# Altium PCB Simple Sensor PCB.PcbDoc
Units mm, origin at the board's own origin, x right, y up, seen from the top; angles counter-clockwise.
Board outline 38.5 x 38.5 mm, 4 copper layers (Top Layer, GND, 3.3V, Bottom Layer), stack 1.334 mm thick; 19 components, 10 nets, 64 pads, 22 vias.
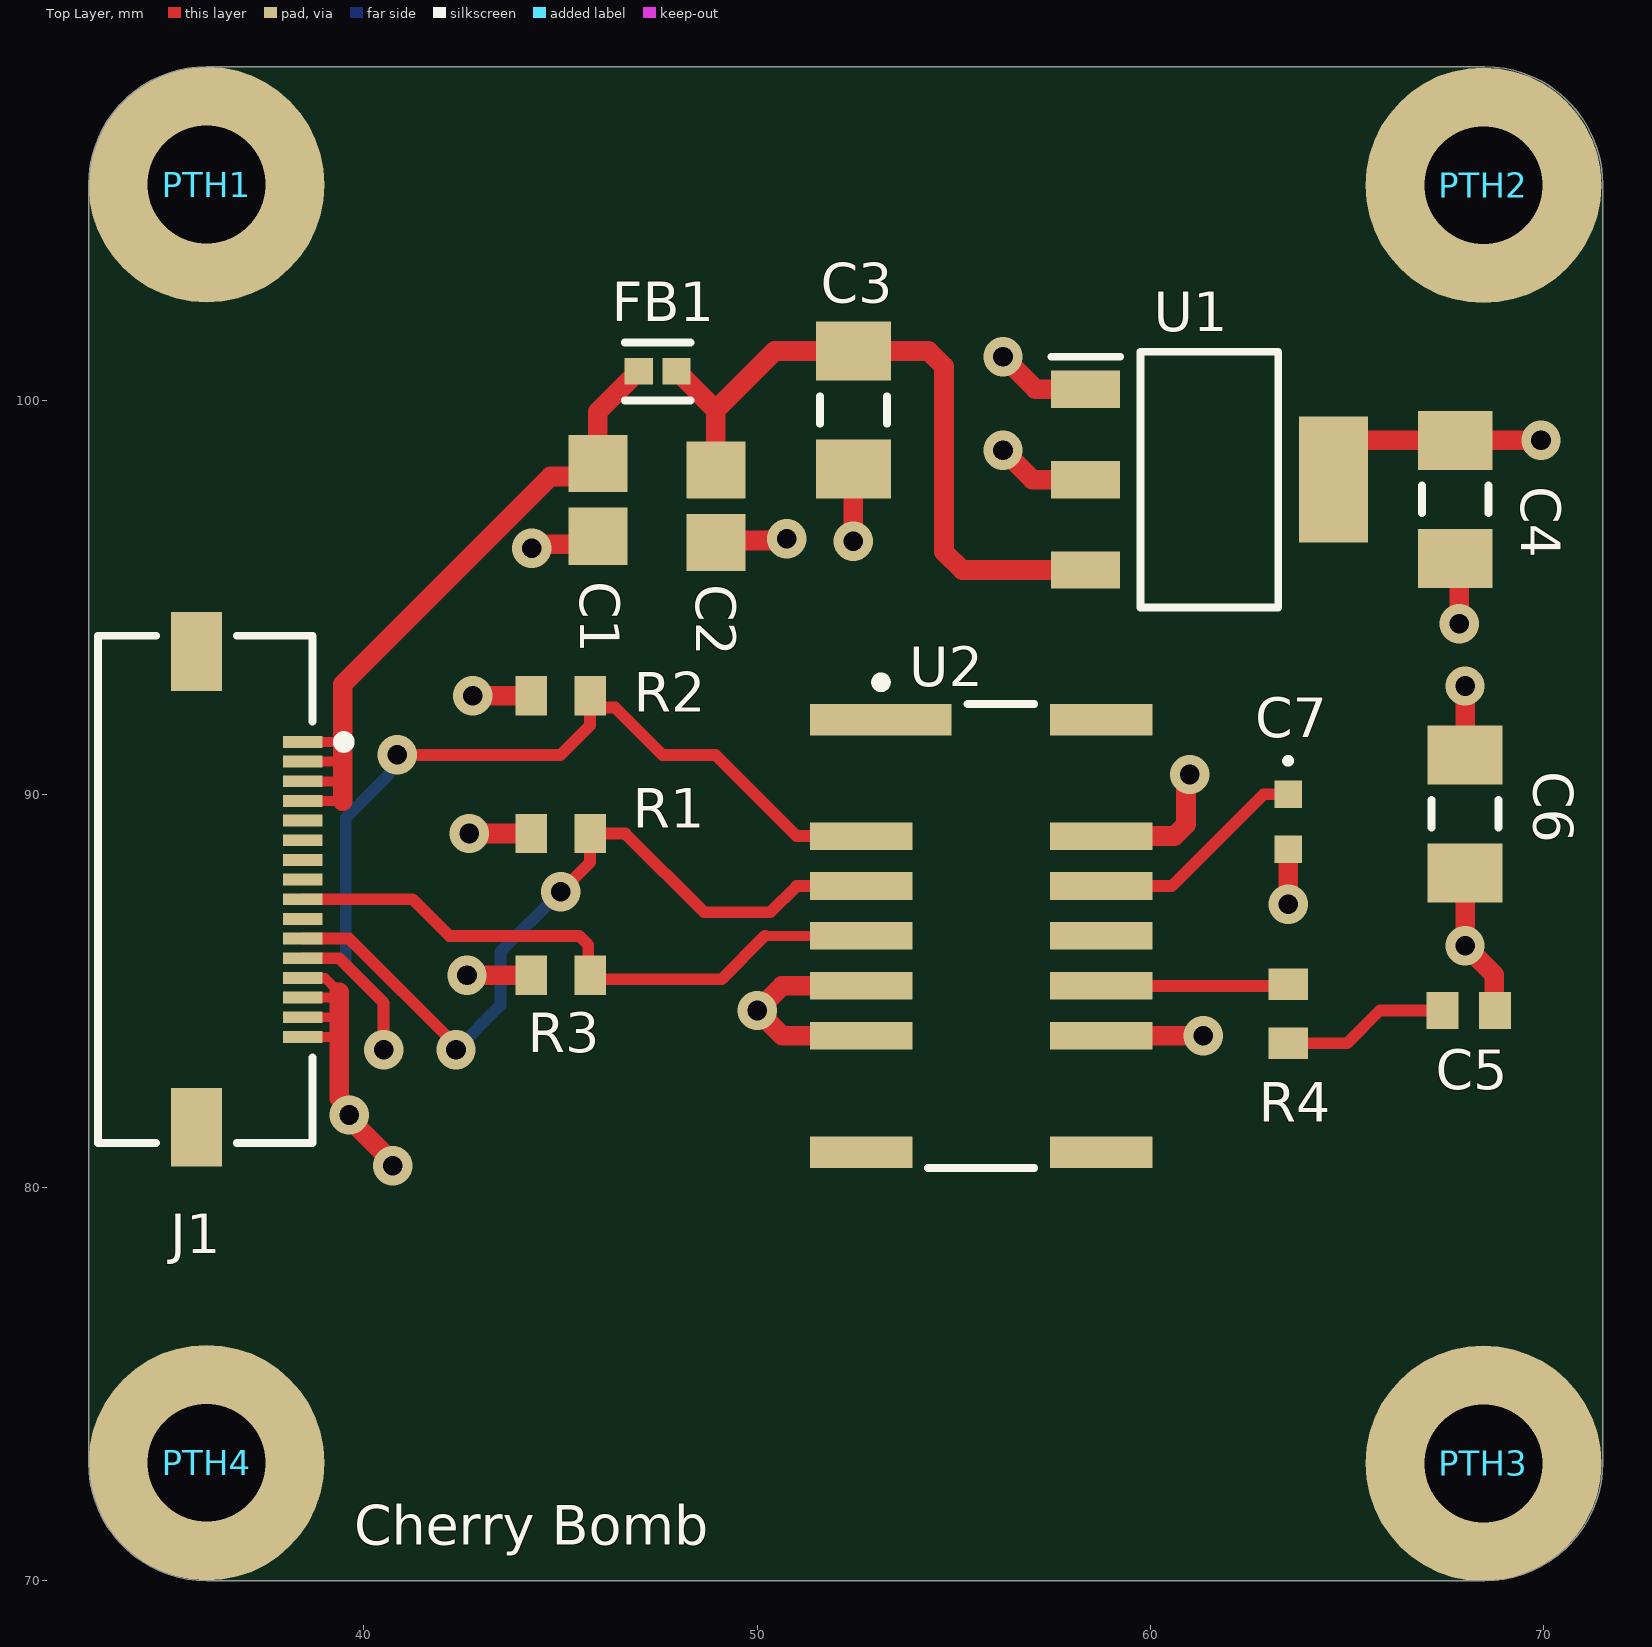
[diagram p0: Top Layer view]
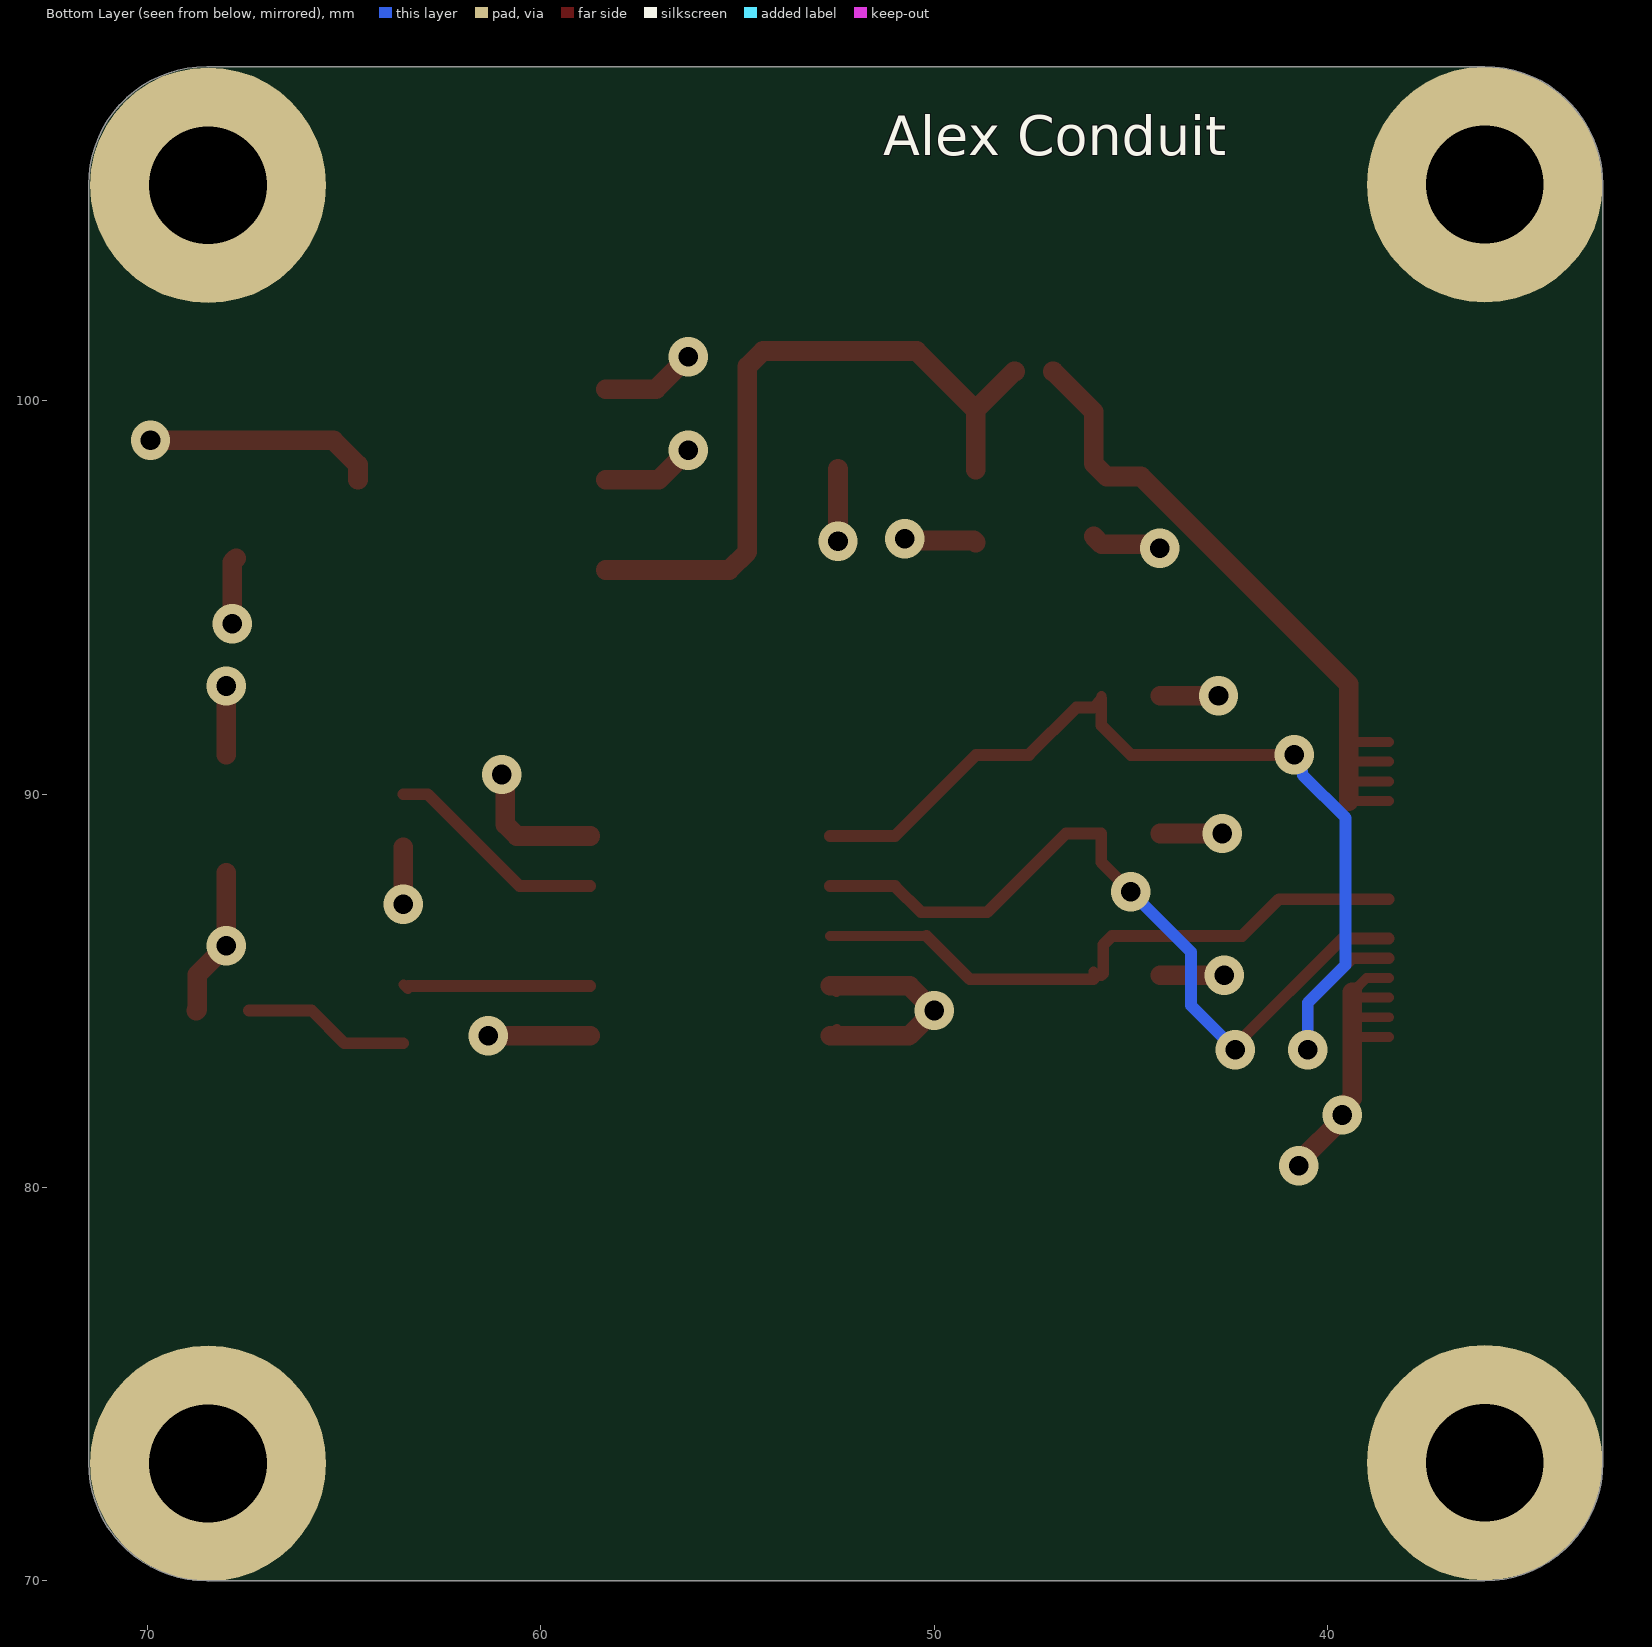
[diagram p1: Bottom Layer view, seen from below]
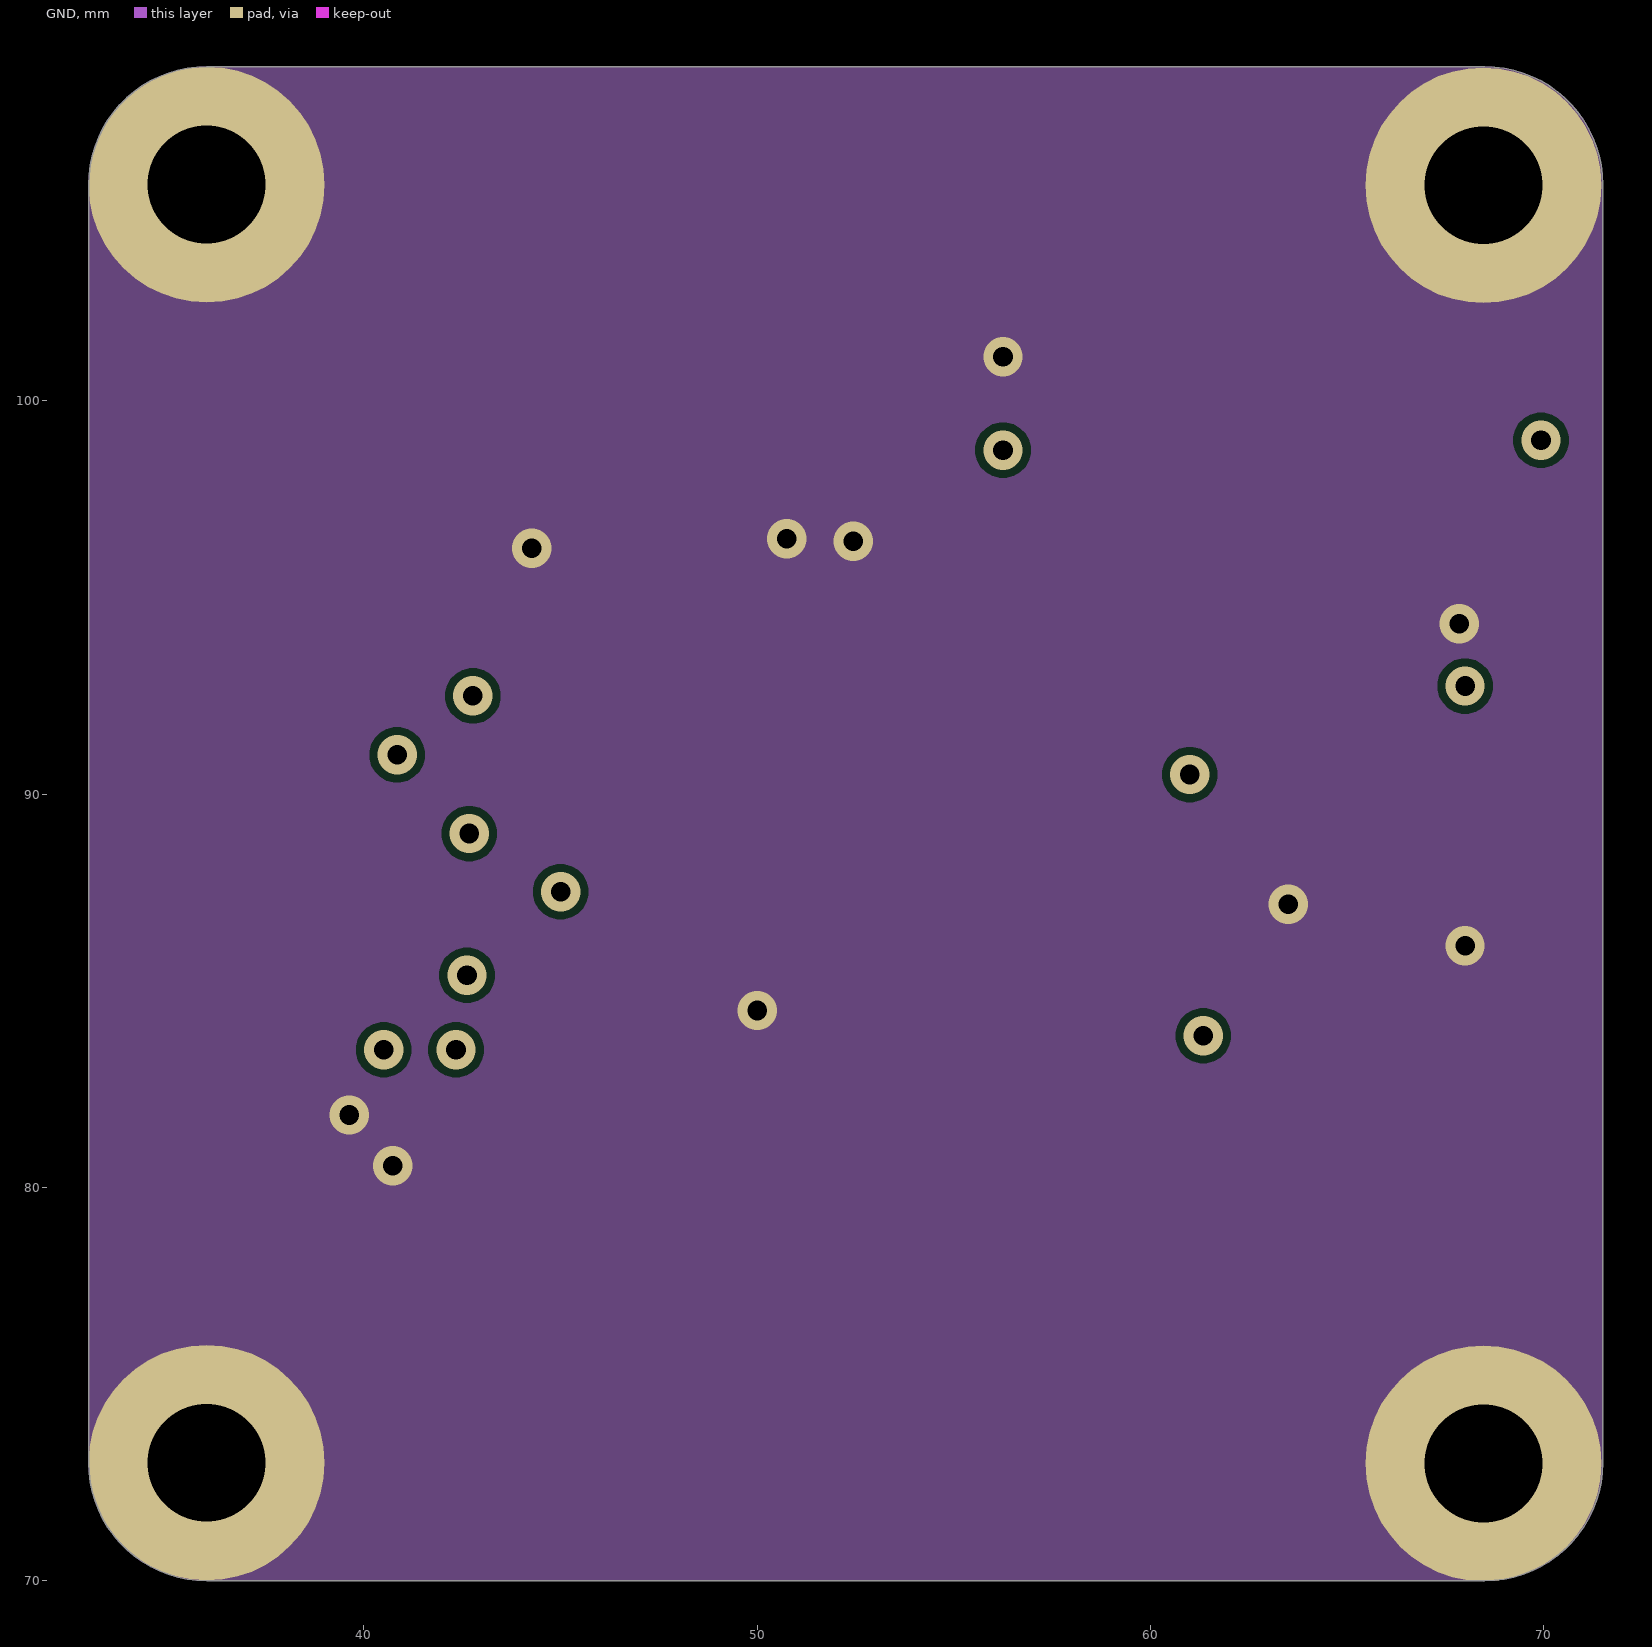
[diagram p2: GND]
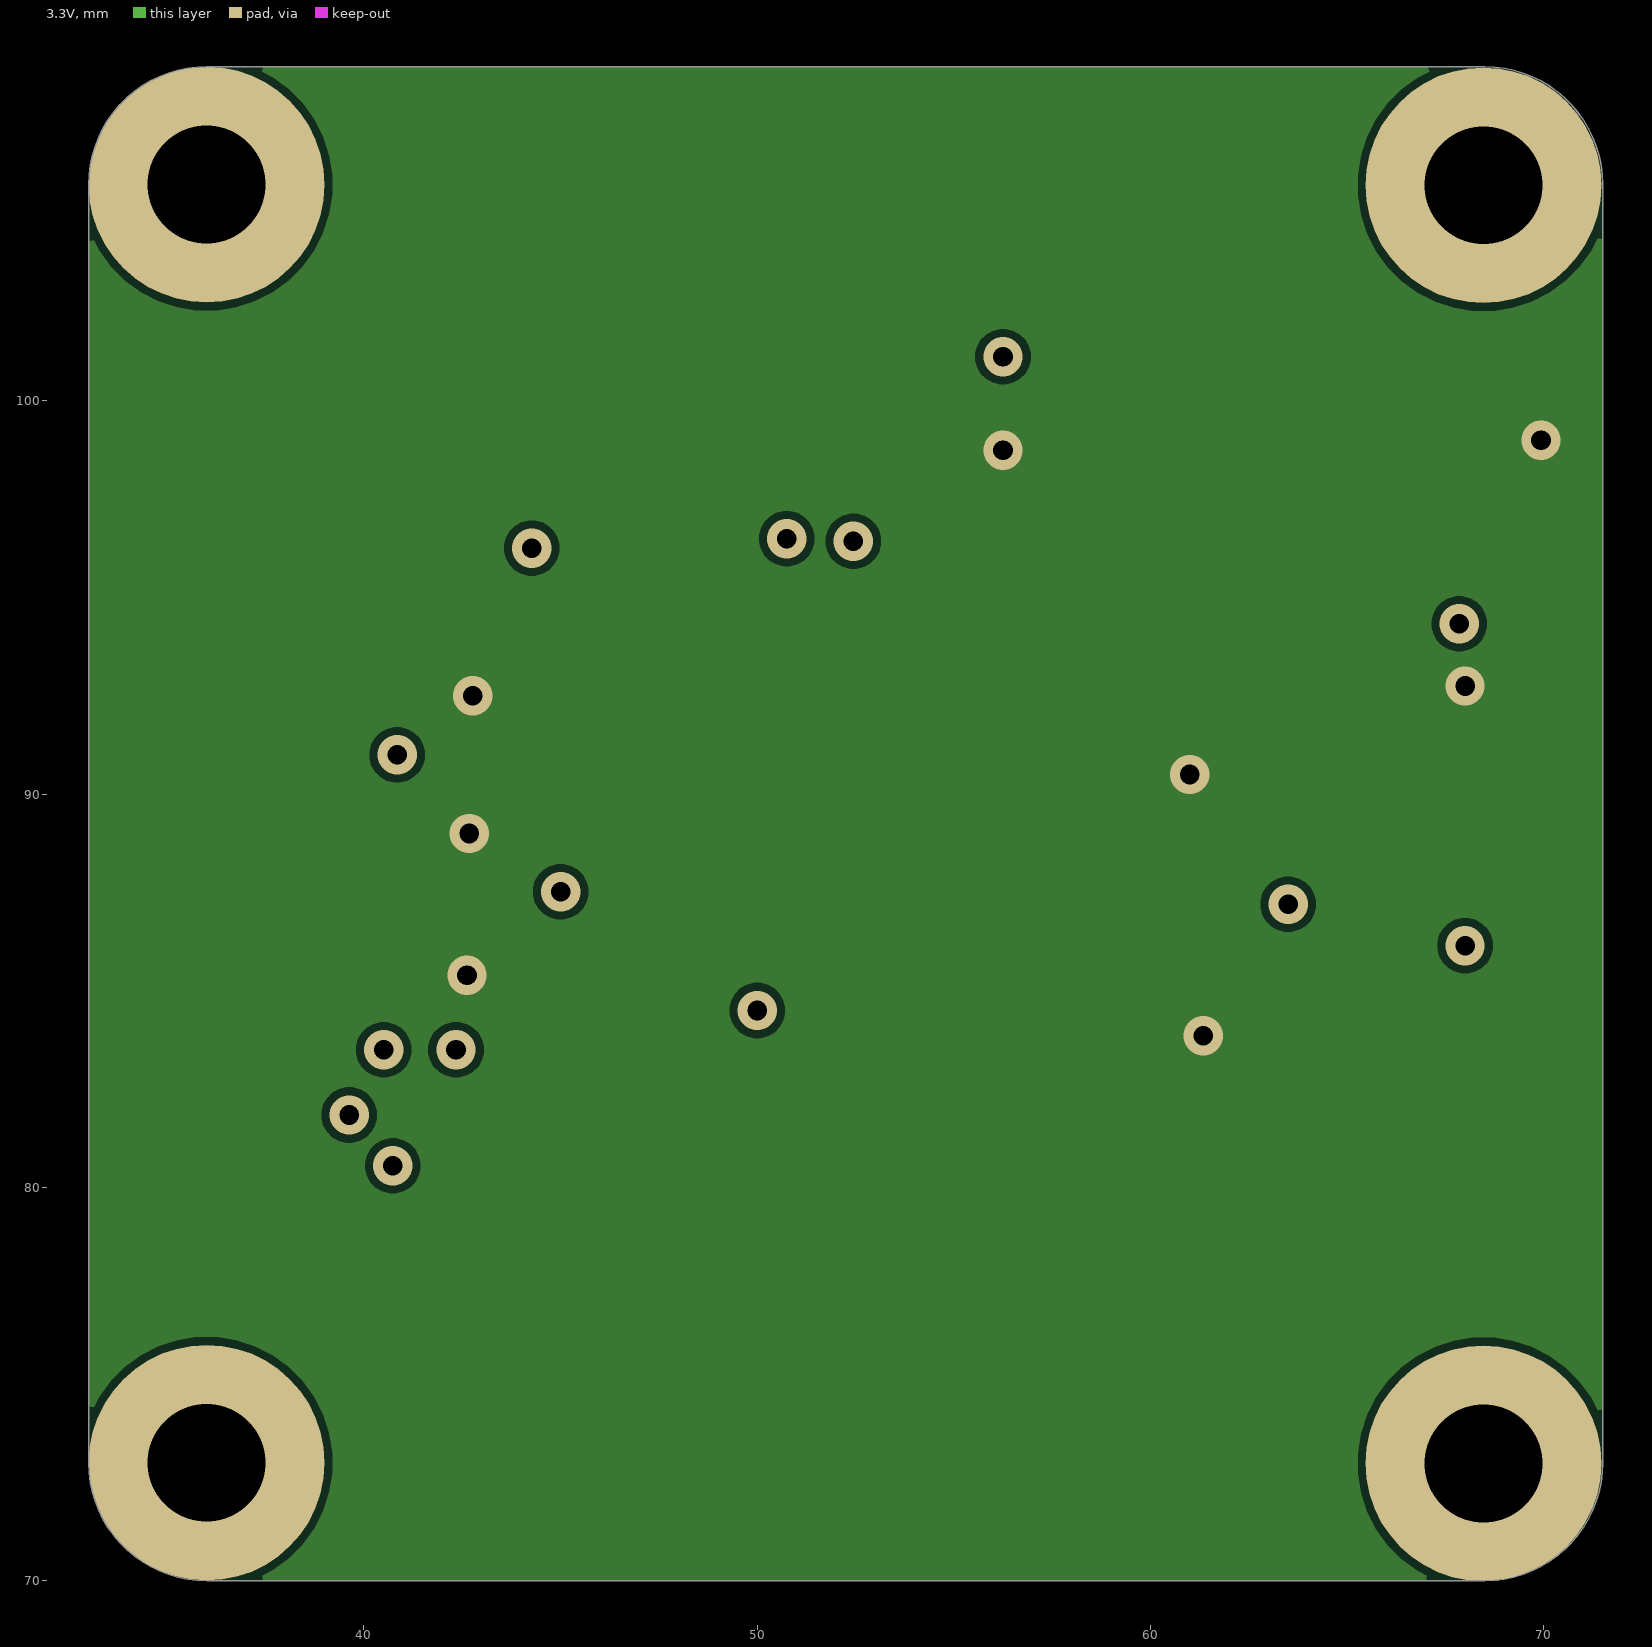
[diagram p3: 3.3V]
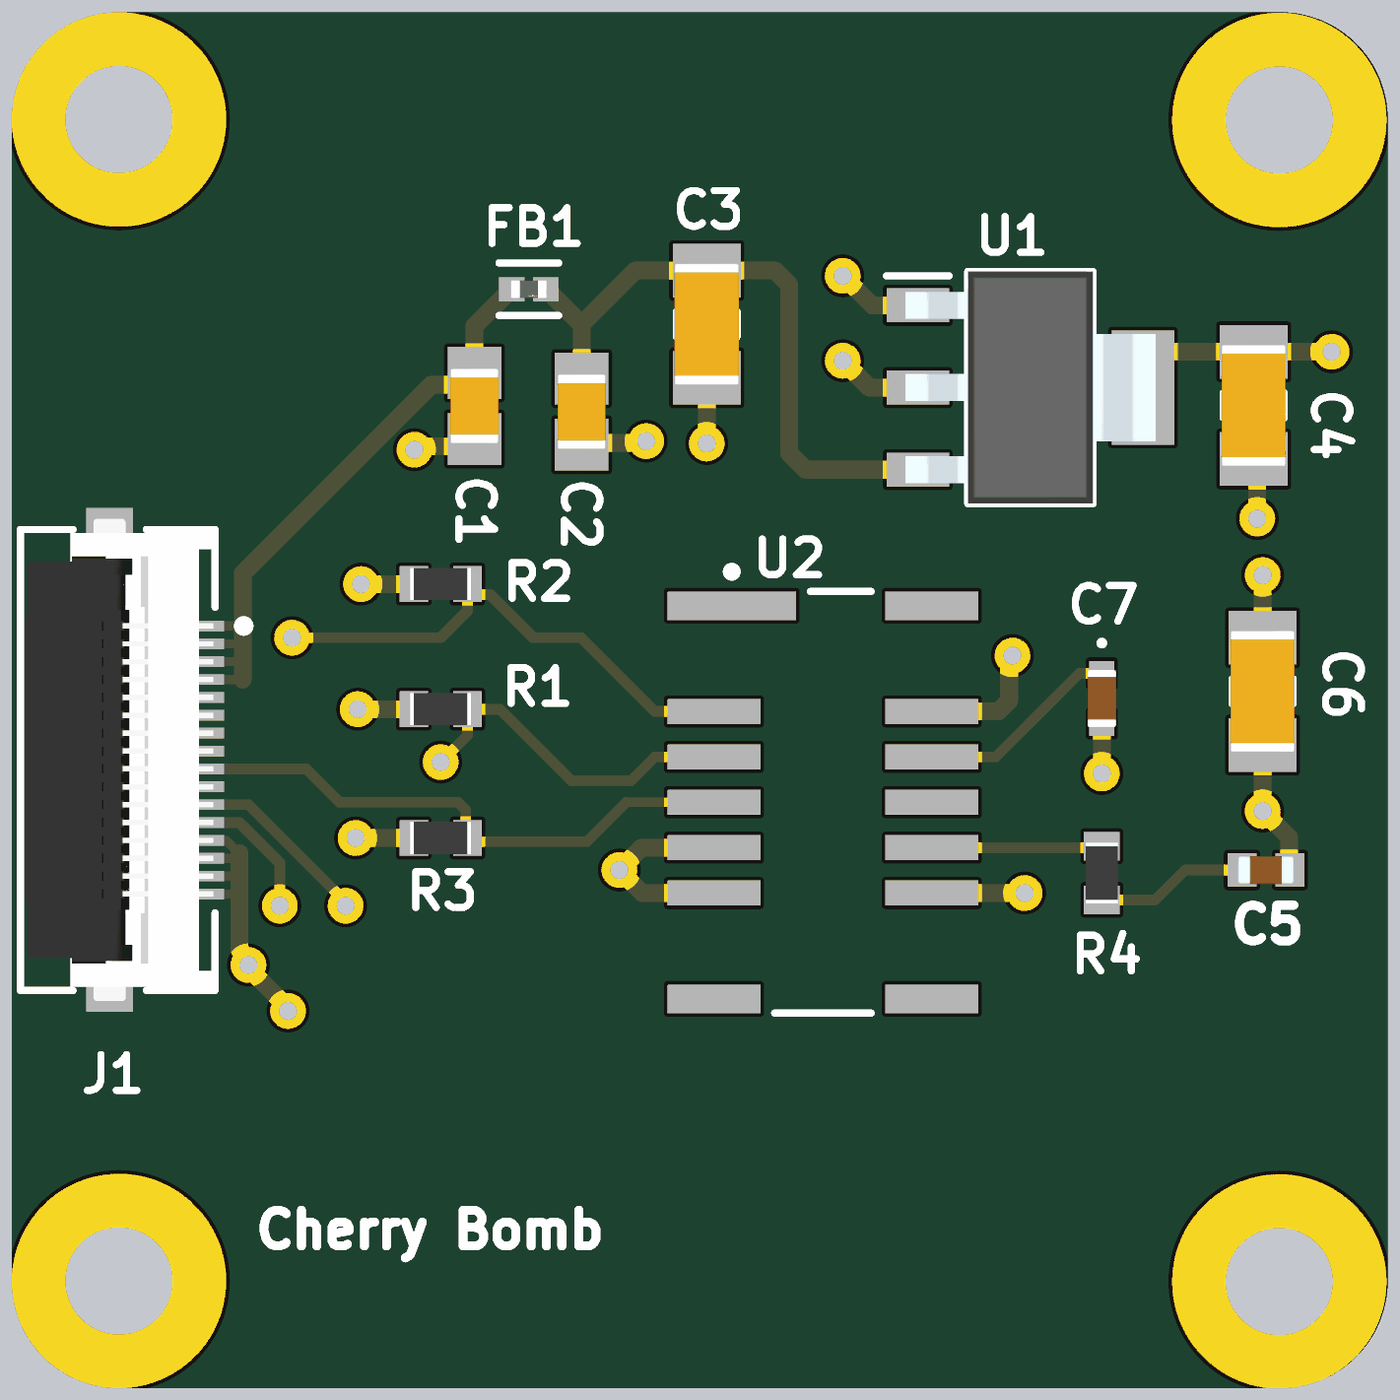
[diagram p4: 3D render of the assembled board from above, using the file's embedded part models]

## Layer stack, top to bottom
Top Solder: solder mask 0.0254, SM-001, Dk 4
Top Layer: signal copper 0.035
Dielectric 1: prepreg 0.1295, PP-017, Dk 4.3
Dielectric 2: prepreg 0.1295, PP-017, Dk 4.3
GND: signal copper 0.0175
Dielectric 3: core 0.7112, Core-039, Dk 4.8
3.3V: signal copper 0.0175
Dielectric 4: prepreg 0.1295, PP-017, Dk 4.3
Dielectric 5: prepreg 0.1295, PP-017, Dk 4.3
Bottom Layer: signal copper 0.035
Bottom Solder: solder mask 0.0254, SM-001, Dk 4

## Board outline
33,73 33,105.5 cw(c36,105.5) 36,108.5 68.5,108.5 cw(c68.5,105.5) 71.5,105.5 71.5,73 cw(c68.5,73) 68.5,70 36,70 cw(c36,73)

## Design rules (kind name [scope] priority, off if disabled: settings)
Clearance [All] p1: gap=0.2 ignorepadtopadclearanceinfootprint=FALSE except(0: Arc-Hole Track-Hole SMDPad-Hole THPad-Hole Via-Hole Fill-Hole Poly-Hole Region-Hole Text-Hole; 0.127: Arc-Arc Arc-Track Track-Track)
HoleSize [All] p1: absolutevalues=TRUE maxlimit=5 minlimit=0.025 maxpercent=80.000 minpercent=20.000
MinimumSolderMaskSliver [All] p1: minsoldermaskwidth=0.154
PolygonConnect PTH-M3Connect [All vs HasFootprint('PTH-M3')] p1: connectstyle=Direct reliefconductorwidth=0.254 reliefentries=4 polygonreliefangle="90 Angle" airgapwidth=0.254
PolygonConnect [All] p2: thpad.connectstyle=Relief thpad.reliefconductorwidth=0.254 thpad.reliefentries=4 thpad.polygonreliefangle="90 Angle" thpad.airgapwidth=0.254 smdpad.connectstyle=Relief smdpad.reliefconductorwidth=0.254 smdpad.reliefentries=4 smdpad.polygonreliefangle="90 Angle" smdpad.airgapwidth=0.254 via.connectstyle=Direct via.reliefconductorwidth=0.254 via.reliefentries=4 via.polygonreliefangle="90 Angle" via.airgapwidth=0.254
RoomDefinition "Simple Sensor Board" [InComponentClass('Simple Sensor Board')] p1: confinementstyle=ConfineIn formatcopy=TRUE lockcomponents=FALSE outline 31,68.5 73.5,68.5 73.5,110 31,110
RoutingVias [All] p1: holewidth=0.3 width=0.6 viastyle="Through Hole" minholewidth=0.3 minwidth=0.6 maxholewidth=0.5 maxwidth=1
SilkToSolderMaskClearance SilkToSolderMaskClearance_1 [IsPad] p1: minsilkscreentomaskgap=0.154 clearancetoexposedcopper=TRUE
SilkToSolderMaskClearance [IsPad] p2: minsilkscreentomaskgap=0.154 clearancetoexposedcopper=TRUE
SolderMaskExpansion [All] p1: expansion=0.102 istentingtop=FALSE
UnRoutedNet [All] p1: checkbadconnections=TRUE
Width [All] p1: maxlimit=0.5 minlimit=0.254 preferedwidth=0.254 minimp=50.000000 maximp=50.000000 favimp=50.000000
26 further rules are at their usual default settings.

## Classes and differential pairs
component class "Simple Sensor Board": C1 C2 C3 C4 C6 FB1 J1 PTH1 PTH2 PTH3 PTH4 R1 R2 R3 R4 U1 U2

## Components (designator, comment, footprint, x,y, rotation, side; value= is the part's Value field where it differs from the comment)
C1 "Capacitor 2.2 uF +/-10% 16 V 0805" CAPC2013X95X50ML10T25 45.946,97.485 r90 top value=2.2uF
C2 "Capacitor 2.2 uF +/-10% 16 V 0805" CAPC2013X95X50ML10T25 48.946,97.325 r90 top value=2.2uF
C3 "Capacitor 10 uF +/- 10% 10 V 1206" CAPC3216X180X50ML20T25 52.446,99.771 r90 top value=10uF
C4 "Capacitor 10 uF +/- 10% 10 V 1206" CAPC3216X180X50ML20T25 67.75,97.5 r90 top value=10uF
C5 "Comment" C1608_Commercial 63.5,89.3 r270 top
C6 "Capacitor 10 uF +/- 10% 10 V 1206" CAPC3216X180X50ML20T25 68,89.5 r90 top value=10uF
C7 "Comment" CAPC1608X90N 68.092,84.5 r0 top
FB1 "BLM15AX601SZ1D" FP-BLM15-0_05-IPC_A 47.467,100.75 r0 top
J1 "505110-1692" FP-505110-1692-MFG 35.964,87.578 r270 top
PTH1 "PTH-M3" PTH-M3 36,105.5 r0 top
PTH2 "PTH-M3" PTH-M3 68.466,105.485 r0 top
PTH3 "PTH-M3" PTH-M3 68.466,72.985 r0 top
PTH4 "PTH-M3" PTH-M3 36,73 r0 top
R1 "Resistor 10k +/-1% 0603 100 mW" RESC1608X55X25ML10T15 45,89 r0 top value=10k
R2 "Resistor 10k +/-1% 0603 100 mW" RESC1608X55X25ML10T15 45,92.5 r0 top value=10k
R3 "Resistor 10k +/-1% 0603 100 mW" RESC1608X55X25ML10T15 45,85.396 r0 top value=10k
R4 "Resistor 20 +/-1% 0603 100 mW" RESC1608X55X25ML10T15 63.5,84.416 r90 top value=20
U1 "REG1117-3.3" SOT230P700X180-4N 61.5,98 r0 top
U2 "AMG8833" PNSC-AMG8833_V 55.696,86.396 r0 top

## Footprints (in the part's own frame and the unit in brackets; to place one, negate y for a bottom-side part, rotate by r counter-clockwise, add the part's x,y. Pads: shape width x height; smd on the part's side, far side on the other; paste and mask are expansions set on the pad)
C1608_Commercial [mm]
  rect 0.7x0.7 smd: 1(-0.7,0) 2(0.7,0)
  silkscreen extent -1.6,-0.05 -1.5,0.05, body extent -0.8,-0.4 0.8,0.4, height 0.8
CAPC1608X90N [mm]
  rect 0.81x0.94 smd: 1(-0.67,0) 2(0.67,0)
  body extent -0.8,-0.4 0.8,0.4, height 0.9
CAPC2013X95X50ML10T25 [mm] "Chip Capacitor, 2-Leads, Body 2.10x1.35mm, IPC Low Density"
  rect 1.45x1.5 smd: 1(-0.925,0) 2(0.925,0)
  body extent -1.05,-0.67 1.05,0.67, height 0.95
CAPC3216X180X50ML20T25 [mm] "Chip Capacitor, 2-Leads, Body 3.40x1.80mm, IPC Low Density"
  rect 1.5x1.9 smd: 1(-1.5,0) 2(1.5,0)
  silkscreen extent -0.35,-0.85 0.35,0.85, body extent -1.7,-0.9 1.7,0.9, height 1.8
FP-505110-1692-MFG [mm]
  rect 0.3x1 smd paste+0 mask+0: 1(-3.75,2.475) 2(-3.25,2.475) 3(-2.75,2.475) 4(-2.25,2.475) 5(-1.75,2.475) 6(-1.25,2.475) 7(-0.75,2.475) 8(-0.25,2.475) 9(0.25,2.475) 10(0.75,2.475) 11(1.25,2.475) 12(1.75,2.475) 13(2.25,2.475) 14(2.75,2.475) 15(3.25,2.475) 16(3.75,2.475)
  rect 2x1.3 smd paste+0 mask+0: 17(-6.05,-0.225) 18(6.05,-0.225)
  silkscreen extent -6.45,-2.73 6.45,3.65, body extent -6.75,-2.62 6.75,2.68, height 1.9
FP-BLM15-0_05-IPC_A [mm]
  rect 0.715x0.672 smd paste+0 mask+0: 1(-0.479,0) 2(0.479,0)
  silkscreen extent -0.84,-0.74 0.84,0.74, body extent -1.04,-0.54 1.04,0.54, height 0.25
PNSC-AMG8833_V [mm] "SMD, 14-Lead, Body 11.6x8mm, Height 4.5mm"
  rect 3.6x0.8 smd: 1(-2.55,5.5)
  rect 2.6x0.7 smd: 2(-3.05,2.54) 3(-3.05,1.27) 4(-3.05,0) 5(-3.05,-1.27) 6(-3.05,-2.54) 9(3.05,-2.54) 10(3.05,-1.27) 11(3.05,0) 12(3.05,1.27) 13(3.05,2.54)
  rect 2.6x0.8 smd: 7(-3.05,-5.5) 8(3.05,-5.5) 14(3.05,5.5)
  silkscreen extent -2.67,-5.9 1.35,6.57, body extent -4,-5.8 4,5.8, height 4.3
PTH-M3 [mm] "M3 Plated Through Hole, 8mm Diameter Pad"
  round 6 hole 3: 1(0,0)
RESC1608X55X25ML10T15 [mm] "Chip Resistor, 2-Leads, Body 1.70x0.90mm, IPC Low Density"
  rect 0.8x1 smd: 1(-0.75,0) 2(0.75,0)
  body extent -0.85,-0.45 0.85,0.45, height 0.55
SOT230P700X180-4N [mm]
  rect 1.75x0.95 smd: 1(-3.15,2.3) 2(-3.15,0) 3(-3.15,-2.3)
  rect 1.75x3.2 smd: 4(3.15,0)
  silkscreen extent -4.03,-3.25 1.75,3.25, body extent -3.5,-3.25 3.5,3.25, height 1.8

## Part data
C1 C2: library part CMP-001-00083-3, "Chip Capacitor, 2.2 uF, +/- 10%, 16 V, 0805 (2012 Metric)", Capacitor Type=Ceramic, Case/Package=0805, Max Operating Temperature=125°C, Min Operating Temperature=-55°C, Tolerance=10%, Voltage Rating=16V, Mounting Technology=SM, Pins=2, RoHS Compliant=Yes
C3 C4 C6: library part CMP-001-00086-2, "Chip Capacitor, 10 uF, +/- 10%, 10 V, 1206 (3216 Metric)", Capacitor Type=Ceramic, Case/Package=1206, Max Operating Temperature=125°C, Min Operating Temperature=-55°C, Tolerance=10%, Voltage Rating=10V, Mounting Technology=SM, Pins=2, RoHS Compliant=Yes
C5: library part CMP-001-00089-1, "Chip Capacitor, 1.5 uF, +/-10%, 25 V, 0603(1608 Metric)"
C7: library part CMP-001-00010-12, "Chip Capacitor, 1 uF, +/-10%, 25 V, 0603(1608 Metric)"
FB1: library part CMP-006-00022-1, "Ferrite Beads Multi-Layer 600Ohm 25% 100MHz 0.5A 0.34Ohm DCR 0402 Automotive T/R"
J1: library part CMP-002-00072-15, "Conn FFC/FPC Connector SKT 16 POS 0.5mm Solder RA SMD Easy-On™ T/R"
PTH1 PTH2 PTH3 PTH4: library part CMP-00028-00010-1, "M3 Plated Through Hole, 8mm Diameter Pad", Pins=1
R1 R2 R3: library part CMP-009-00017-6, "Chip Resistor, 10 KOhm, +/- 1%, 01 W, -55 to 155 degC, 0603 (1608 Metric)", Case/Package=0603, Max Operating Temperature=155°C, Min Operating Temperature=-55°C, Power=100mW, Tolerance=1%, Voltage Rating=50V, Mounting Technology=SM, Pins=2, RoHS Compliant=True
R4: library part CMP-009-00187-1, "Chip Resistor, 20 Ohm, +/- 1%, 0.1 W, -55 to 155 degC, 0603 (1608 Metric)", Case/Package=0603, Max Operating Temperature=155°C, Min Operating Temperature=-55°C, Power=100mW, Tolerance=1%, Mounting Technology=SM, Pins=2, RoHS Compliant=True
U1: "Integrated Circuit", Manufacturer_Name="Texas Instruments", Mouser2 Part Number=595-REG1117-3.3, Datasheet Link=https://datasheet.datasheetarchive.com/originals/distributors/Datasheets-SFU2/DSASFU100026654.pdf, Height=1.8mm, Manufacturer_Part_Number=REG1117-3.3, Mouser2 Price/Stock=https://www.mouser.com/Search/Refine.aspx?Keyword=595-REG1117-3.3
U2: library part CMP-010-00026-2, "Infrared Array Sensor, Grid-EYE, 8 Pixels H, 8 Pixels V, 3.3V, High Gain Type"

## Via types
v1: diameter 1, hole 0.5, Top Layer to Bottom Layer, 22 vias

## Nets (pads, with @x,y where several pads share a name; then routed paths per layer and width w, separated by ;. In a path a pad name is that pad's centre, name@x,y a point inside that pad or via, vN(x,y) a via of type N, cw(c..) or ccw(c..) an arc to the next point about the centre after c; other vN are vias at no path point)
3.3V: C4.2 C6.2 R1.1 R2.1 R3.1 U1.2 U1.4 U2.9 U2.13 | length 20.9
  Top Layer w0.5: v1(42.62,85.396) R3.1 ; v1(42.678,89) R1.1 ; v1(42.77,92.5) R2.1 ; v1(56.25,98.75) 57,98 U1.2 ; U2.9 v1(61.34,83.856) ; U2.13 60.611,88.936 60.904,89.229 60.904,90.404 v1(61,90.5) ; U1.4 64.65,98.375 65.275,99 C4.2 v1(69.93,99) ; C6.2 v1(68,92.75)
+VBAT: C1.2 FB1.1 J1.1 J1.2 J1.3 J1.4 | length 18.7
  Top Layer w0.254: J1.4 39.462,89.828 ; J1.3 39.447,90.328 39.462,90.313 ; J1.2 39.432,90.828 39.462,90.798 ; J1.1 39.34,91.328 39.462,91.206
  Top Layer w0.5: 39.462,89.828 39.462,90.313 39.462,90.798 39.462,91.206 39.462,92.798 44.742,98.078 45.614,98.078 C1.2 45.946,99.729 46.967,100.75 FB1.1
GND: C1.1 C2.1 C3.1 C4.1 C5.2 C6.1 C7.2 J1.13 J1.14 J1.15 J1.16 PTH1.1 PTH2.1 PTH3.1 PTH4.1 U1.1 U2.5 U2.6 | length 30.2
  Top Layer w0.254: J1.16 39.311,83.828 39.37,83.77 ; J1.15 39.33,84.328 39.37,84.368 ; J1.14 39.208,84.828 39.37,84.667 ; J1.13 39.007,85.328 39.37,84.966 ; U2.6@52.466,84.035 U2.6 ; U2.5@52.485,84.965 U2.5
  Top Layer w0.5: 39.37,84.966 39.37,84.667 39.37,84.368 39.37,83.77 39.37,82.272 39.622,82.02 39.622,81.752 40.73,80.644 v1(40.73,80.554) ; v1(44.266,96.259) 44.362,96.354 45.741,96.354 C1.1 ; C2.1 48.996,96.45 50.7,96.45 v1(50.75,96.5) ; v1(52.446,96.435) C3.1 ; U2.6 50.644,83.856 v1(50,84.5) 50.626,85.126 U2.5 ; v1(56.25,101.125) 57.075,100.3 U1.1 ; v1(63.5,87.2) C5.2@63.5,88.65 ; C4.1 67.85,95.9 v1(67.85,94.333) ; C6.1 v1(68,86.15) 68.738,85.412 68.738,84.524 C7.2
  other v1: 39.622,81.842
NetC5_2: C5.1 U2.12 | length 5.7
  Top Layer w0.3: U2.12 60.542,87.666 62.876,89.999 C5.1
NetC7_2: C7.1 R4.1 | length 4.3
  Top Layer w0.3: R4.1 65,83.666 65.834,84.5 C7.1
NetR4_2: R4.2 U2.10 | length 4.8
  Top Layer w0.254: R4.2@63.376,85.042 R4.2
  Top Layer w0.3: U2.10 R4.2@63.376,85.126
Sensor_INT: J1.9 R3.2 U2.4 | length 15.9
  Top Layer w0.254: 39.05,87.328 39.073,87.305 ; R3.2@45.946,85.296 R3.2@45.946,85.496 ; 50.196,86.396 U2.4
  Top Layer w0.3: J1.9 39.05,87.328 41.235,87.328 42.168,86.396 45.476,86.396 45.702,86.17 45.702,85.444 R3.2 ; R3.2@45.946,85.296 49.096,85.296 50.196,86.396
Sensor_SCL: J1.11 R1.2 U2.3 | length 20
  Top Layer w0.254: v1(42.34,83.5) v1@42.34,83.61
  Top Layer w0.3: J1.11 39.622,86.328 v1@42.34,83.61 ; v1(45,87.52) 45.75,88.27 R1.2 46.65,89 48.65,87 50.334,87 51,87.666 U2.3
  Bottom Layer w0.3: v1(42.34,83.5) 43.47,84.63 43.47,85.99 v1(45,87.52)
Sensor_SDA: J1.12 R2.2 U2.2 | length 26.5
  Top Layer w0.254: R2.2@45.75,92.428 R2.2
  Top Layer w0.3: J1.12 39.37,85.828 40.5,84.698 v1(40.5,83.5) ; v1(40.842,91) 45,91 45.75,91.75 R2.2@45.75,92.4 ; R2.2@45.75,92.428 R2.2@45.75,92.4 ; U2.2 51,88.936 48.936,91 47.59,91 46.388,92.202 45.948,92.202 R2.2@45.75,92.4
  Bottom Layer w0.254: 40.623,90.481 40.623,90.579 40.842,90.798 v1(40.842,91)
  Bottom Layer w0.3: v1(40.5,83.5) 40.5,84.698 39.538,85.66 39.538,89.396 40.623,90.481
VBAT: C2.2 C3.2 FB1.2 U1.3 | length 18
  Top Layer w0.5: FB1.2 47.967,100.75 48.946,99.771 ; C2.2 48.946,99.771 ; U1.3 55.214,95.7 54.75,96.164 54.75,100.875 54.354,101.271 C3.2 50.446,101.271 48.946,99.771
pads on no net: J1.5 J1.6 J1.7 J1.8 J1.10 J1.17 J1.18 U2.1 U2.7 U2.8 U2.11 U2.14

## Polygon pours and split planes (outlines as drawn)
3.3V on 3.3V "3.3V_L03_P002" (solid, pour order 2): 33,108.5 33,70 71.5,70 71.5,108.5
3.3V on 3.3V "3.3V_L03_P001" (solid, pour order 1): 33,108.5 33,70 71.5,70 71.5,108.5
GND on GND "GND_L02_P003" (solid, pour order 3): 33,105.5 33,73 ccw(c36,73) 36,70 68.5,70 ccw(c68.5,73) 71.5,73 71.5,105.5 ccw(c68.5,105.5) 68.5,108.5 36,108.5 ccw(c36,105.5)

## Silkscreen, mask and mechanical layers (free items; w line width, h text height)
Top Overlay:
  text "Cherry Bomb" at 39.75,70.915 h1
Bottom Overlay:
  text "Alex Conduit" at 51.292,106.254 h1
Mechanical 1:
  the board outline again, w0.254